# EAGLE board passives (EAGLE 6.3)
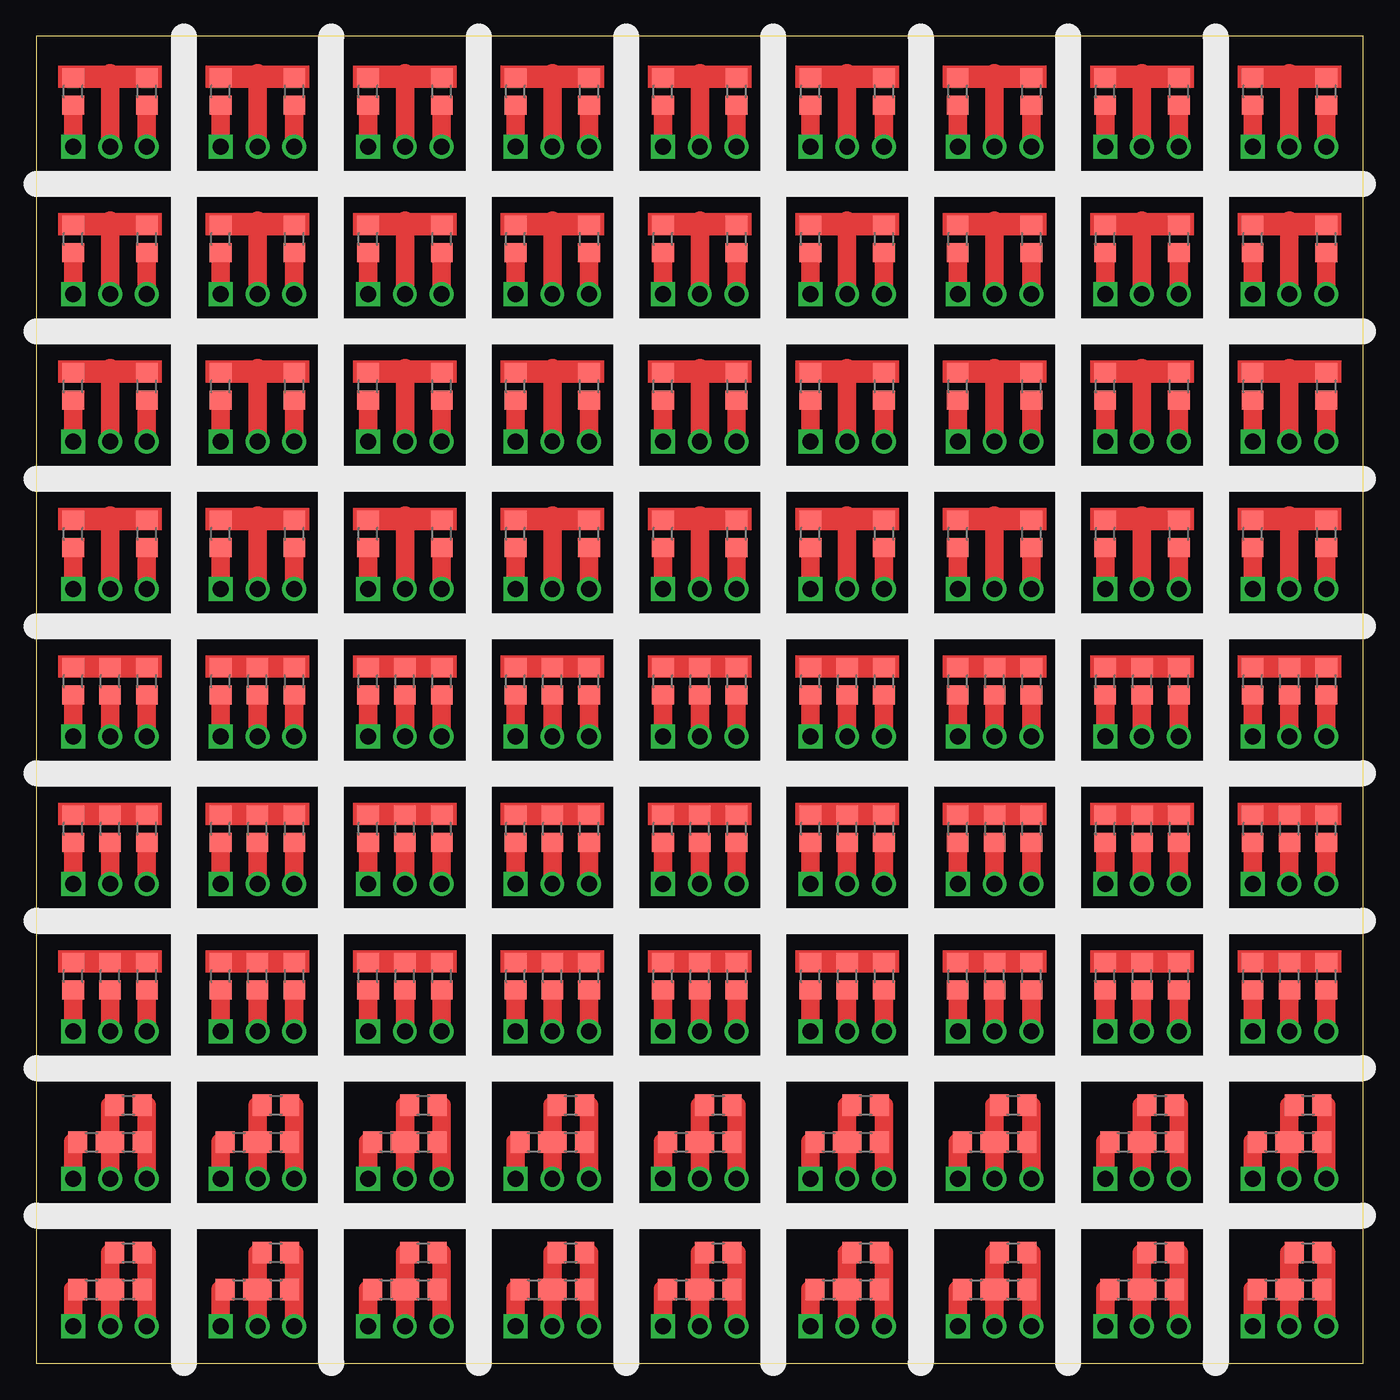
[diagram p0: board, top side]

Size 91.44 x 91.44 mm. Coordinates in mm from the lower left corner, seen from the top.
Outline: 0,0 91.44,0 91.44,91.44 0,91.44 0,0
Copper layers (1*16): Top 0.035mm / dielectric 1.5mm / Bottom 0.035mm
Design rules "default": minimum track width 10mil, minimum drill 24mil, track to track 8mil, track to pad 8mil, pad to pad 8mil, via to via 8mil, smd to smd 8mil, copper to edge 40mil, drill to drill 8mil, minimum pad ring 10mil, minimum via ring 8mil, stop-mask expansion 4mil, vias tented up to drill 0mil, thermal gap 10mil

## Footprints (pad centres in the part's own frame; a part is rotated, then mirrored left to right if it is on the bottom)
R0805 = smd 1.3 x 1.5: 1 -0.95,0; 2 0.95,0

## Placement (x,y rotation side)
E$1  [R0805]  3.81,5.08 0 top
E$2  [R0805]  6.35,5.08 0 top
E$3  [R0805]  13.97,5.08 0 top
E$4  [R0805]  16.51,5.08 0 top
E$5  [R0805]  24.13,5.08 0 top
E$6  [R0805]  26.67,5.08 0 top
E$7  [R0805]  34.29,5.08 0 top
E$8  [R0805]  36.83,5.08 0 top
E$9  [R0805]  44.45,5.08 0 top
E$10  [R0805]  46.99,5.08 0 top
E$11  [R0805]  54.61,5.08 0 top
E$12  [R0805]  57.15,5.08 0 top
E$13  [R0805]  64.77,5.08 0 top
E$14  [R0805]  67.31,5.08 0 top
E$15  [R0805]  74.93,5.08 0 top
E$16  [R0805]  77.47,5.08 0 top
E$17  [R0805]  85.09,5.08 0 top
E$18  [R0805]  87.63,5.08 0 top
E$19  [R0805]  3.81,15.24 0 top
E$20  [R0805]  6.35,15.24 0 top
E$21  [R0805]  13.97,15.24 0 top
E$22  [R0805]  16.51,15.24 0 top
E$23  [R0805]  24.13,15.24 0 top
E$24  [R0805]  26.67,15.24 0 top
E$25  [R0805]  34.29,15.24 0 top
E$26  [R0805]  36.83,15.24 0 top
E$27  [R0805]  44.45,15.24 0 top
E$28  [R0805]  46.99,15.24 0 top
E$29  [R0805]  54.61,15.24 0 top
E$30  [R0805]  57.15,15.24 0 top
E$31  [R0805]  64.77,15.24 0 top
E$32  [R0805]  67.31,15.24 0 top
E$33  [R0805]  74.93,15.24 0 top
E$34  [R0805]  77.47,15.24 0 top
E$35  [R0805]  85.09,15.24 0 top
E$36  [R0805]  87.63,15.24 0 top
E$37  [R0805]  6.35,7.62 0 top
E$38  [R0805]  16.51,7.62 0 top
E$39  [R0805]  26.67,7.62 0 top
E$40  [R0805]  36.83,7.62 0 top
E$41  [R0805]  46.99,7.62 0 top
E$42  [R0805]  57.15,7.62 0 top
E$43  [R0805]  67.31,7.62 0 top
E$44  [R0805]  77.47,7.62 0 top
E$45  [R0805]  87.63,7.62 0 top
E$46  [R0805]  6.35,17.78 0 top
E$47  [R0805]  16.51,17.78 0 top
E$48  [R0805]  26.67,17.78 0 top
E$49  [R0805]  36.83,17.78 0 top
E$50  [R0805]  46.99,17.78 0 top
E$51  [R0805]  57.15,17.78 0 top
E$52  [R0805]  67.31,17.78 0 top
E$53  [R0805]  77.47,17.78 0 top
E$54  [R0805]  87.63,17.78 0 top
E$55  [R0805]  2.54,26.67 90 top
E$56  [R0805]  5.08,26.67 90 top
E$57  [R0805]  7.62,26.67 90 top
E$58  [R0805]  12.7,26.67 90 top
E$59  [R0805]  15.24,26.67 90 top
E$60  [R0805]  17.78,26.67 90 top
E$61  [R0805]  22.86,26.67 90 top
E$62  [R0805]  25.4,26.67 90 top
E$63  [R0805]  27.94,26.67 90 top
E$64  [R0805]  33.02,26.67 90 top
E$65  [R0805]  35.56,26.67 90 top
E$66  [R0805]  38.1,26.67 90 top
E$67  [R0805]  43.18,26.67 90 top
E$68  [R0805]  45.72,26.67 90 top
E$69  [R0805]  48.26,26.67 90 top
E$70  [R0805]  53.34,26.67 90 top
E$71  [R0805]  55.88,26.67 90 top
E$72  [R0805]  58.42,26.67 90 top
E$73  [R0805]  63.5,26.67 90 top
E$74  [R0805]  66.04,26.67 90 top
E$75  [R0805]  68.58,26.67 90 top
E$76  [R0805]  73.66,26.67 90 top
E$77  [R0805]  76.2,26.67 90 top
E$78  [R0805]  78.74,26.67 90 top
E$79  [R0805]  83.82,26.67 90 top
E$80  [R0805]  86.36,26.67 90 top
E$81  [R0805]  88.9,26.67 90 top
E$82  [R0805]  2.54,36.83 90 top
E$83  [R0805]  5.08,36.83 90 top
E$84  [R0805]  7.62,36.83 90 top
E$85  [R0805]  12.7,36.83 90 top
E$86  [R0805]  15.24,36.83 90 top
E$87  [R0805]  17.78,36.83 90 top
E$88  [R0805]  22.86,36.83 90 top
E$89  [R0805]  25.4,36.83 90 top
E$90  [R0805]  27.94,36.83 90 top
E$91  [R0805]  33.02,36.83 90 top
E$92  [R0805]  35.56,36.83 90 top
E$93  [R0805]  38.1,36.83 90 top
E$94  [R0805]  43.18,36.83 90 top
E$95  [R0805]  45.72,36.83 90 top
E$96  [R0805]  48.26,36.83 90 top
E$97  [R0805]  53.34,36.83 90 top
E$98  [R0805]  55.88,36.83 90 top
E$99  [R0805]  58.42,36.83 90 top
E$100  [R0805]  63.5,36.83 90 top
E$101  [R0805]  66.04,36.83 90 top
E$102  [R0805]  68.58,36.83 90 top
E$103  [R0805]  73.66,36.83 90 top
E$104  [R0805]  76.2,36.83 90 top
E$105  [R0805]  78.74,36.83 90 top
E$106  [R0805]  83.82,36.83 90 top
E$107  [R0805]  86.36,36.83 90 top
E$108  [R0805]  88.9,36.83 90 top
E$109  [R0805]  2.54,46.99 90 top
E$110  [R0805]  5.08,46.99 90 top
E$111  [R0805]  7.62,46.99 90 top
E$112  [R0805]  12.7,46.99 90 top
E$113  [R0805]  15.24,46.99 90 top
E$114  [R0805]  17.78,46.99 90 top
E$115  [R0805]  22.86,46.99 90 top
E$116  [R0805]  25.4,46.99 90 top
E$117  [R0805]  27.94,46.99 90 top
E$118  [R0805]  33.02,46.99 90 top
E$119  [R0805]  35.56,46.99 90 top
E$120  [R0805]  38.1,46.99 90 top
E$121  [R0805]  43.18,46.99 90 top
E$122  [R0805]  45.72,46.99 90 top
E$123  [R0805]  48.26,46.99 90 top
E$124  [R0805]  53.34,46.99 90 top
E$125  [R0805]  55.88,46.99 90 top
E$126  [R0805]  58.42,46.99 90 top
E$127  [R0805]  63.5,46.99 90 top
E$128  [R0805]  66.04,46.99 90 top
E$129  [R0805]  68.58,46.99 90 top
E$130  [R0805]  73.66,46.99 90 top
E$131  [R0805]  76.2,46.99 90 top
E$132  [R0805]  78.74,46.99 90 top
E$133  [R0805]  83.82,46.99 90 top
E$134  [R0805]  86.36,46.99 90 top
E$135  [R0805]  88.9,46.99 90 top
E$136  [R0805]  2.54,57.15 90 top
E$137  [R0805]  2.54,67.31 90 top
E$138  [R0805]  7.62,57.15 90 top
E$139  [R0805]  12.7,57.15 90 top
E$140  [R0805]  7.62,67.31 90 top
E$141  [R0805]  17.78,57.15 90 top
E$142  [R0805]  22.86,57.15 90 top
E$143  [R0805]  12.7,67.31 90 top
E$144  [R0805]  27.94,57.15 90 top
E$145  [R0805]  33.02,57.15 90 top
E$146  [R0805]  17.78,67.31 90 top
E$147  [R0805]  38.1,57.15 90 top
E$148  [R0805]  43.18,57.15 90 top
E$149  [R0805]  22.86,67.31 90 top
E$150  [R0805]  48.26,57.15 90 top
E$151  [R0805]  53.34,57.15 90 top
E$152  [R0805]  27.94,67.31 90 top
E$153  [R0805]  58.42,57.15 90 top
E$154  [R0805]  63.5,57.15 90 top
E$155  [R0805]  33.02,67.31 90 top
E$156  [R0805]  68.58,57.15 90 top
E$157  [R0805]  73.66,57.15 90 top
E$158  [R0805]  38.1,67.31 90 top
E$159  [R0805]  78.74,57.15 90 top
E$160  [R0805]  83.82,57.15 90 top
E$161  [R0805]  43.18,67.31 90 top
E$162  [R0805]  88.9,57.15 90 top
E$163  [R0805]  48.26,67.31 90 top
E$164  [R0805]  53.34,67.31 90 top
E$165  [R0805]  58.42,67.31 90 top
E$166  [R0805]  63.5,67.31 90 top
E$167  [R0805]  68.58,67.31 90 top
E$168  [R0805]  73.66,67.31 90 top
E$169  [R0805]  78.74,67.31 90 top
E$170  [R0805]  83.82,67.31 90 top
E$171  [R0805]  88.9,67.31 90 top
E$172  [R0805]  2.54,77.47 90 top
E$173  [R0805]  7.62,77.47 90 top
E$174  [R0805]  12.7,77.47 90 top
E$175  [R0805]  17.78,77.47 90 top
E$176  [R0805]  22.86,77.47 90 top
E$177  [R0805]  27.94,77.47 90 top
E$178  [R0805]  33.02,77.47 90 top
E$179  [R0805]  38.1,77.47 90 top
E$180  [R0805]  43.18,77.47 90 top
E$181  [R0805]  48.26,77.47 90 top
E$182  [R0805]  53.34,77.47 90 top
E$183  [R0805]  58.42,77.47 90 top
E$184  [R0805]  63.5,77.47 90 top
E$185  [R0805]  68.58,77.47 90 top
E$186  [R0805]  73.66,77.47 90 top
E$187  [R0805]  78.74,77.47 90 top
E$188  [R0805]  83.82,77.47 90 top
E$189  [R0805]  88.9,77.47 90 top
E$190  [R0805]  2.54,87.63 90 top
E$191  [R0805]  7.62,87.63 90 top
E$192  [R0805]  12.7,87.63 90 top
E$193  [R0805]  17.78,87.63 90 top
E$194  [R0805]  22.86,87.63 90 top
E$195  [R0805]  27.94,87.63 90 top
E$196  [R0805]  33.02,87.63 90 top
E$197  [R0805]  38.1,87.63 90 top
E$198  [R0805]  43.18,87.63 90 top
E$199  [R0805]  48.26,87.63 90 top
E$200  [R0805]  53.34,87.63 90 top
E$201  [R0805]  58.42,87.63 90 top
E$202  [R0805]  63.5,87.63 90 top
E$203  [R0805]  68.58,87.63 90 top
E$204  [R0805]  73.66,87.63 90 top
E$205  [R0805]  78.74,87.63 90 top
E$206  [R0805]  83.82,87.63 90 top
E$207  [R0805]  88.9,87.63 90 top

## Library data of the parts
E$1-E$207 = nolan-utsa

## Tracks (layer width: path | path; a pad name or v marks a point on that pad's centre or on a via)
S$1  (via drill 1.1)
  Top 1.27: v2.54,2.54 2.54,5.08
S$2  (via drill 1.1)
  Top 1.27: v12.7,2.54 12.7,5.08
S$3  (via drill 1.1)
  Top 1.27: v5.08,2.54 5.08,7.62
S$4  (via drill 1.1)
  Top 1.27: v7.62,2.54 7.62,7.62
S$5  (via drill 1.1)
  Top 1.27: 15.24,7.62 v15.24,2.54
S$6  (via drill 1.1)
  Top 1.27: v17.78,2.54 17.78,7.62
S$7  (via drill 1.1)
  Top 1.27: v22.86,2.54 22.86,5.08
S$8  (via drill 1.1)
  Top 1.27: v25.4,2.54 25.4,7.62
S$9  (via drill 1.1)
  Top 1.27: v27.94,2.54 27.94,7.62
S$10  (via drill 1.1)
  Top 1.27: v33.02,2.54 33.02,5.08
S$11  (via drill 1.1)
  Top 1.27: v35.56,2.54 35.56,7.62
S$12  (via drill 1.1)
  Top 1.27: v38.1,2.54 38.1,7.62
S$13  (via drill 1.1)
  Top 1.27: v43.18,2.54 43.18,5.08
S$14  (via drill 1.1)
  Top 1.27: v45.72,2.54 45.72,7.62
S$15  (via drill 1.1)
  Top 1.27: v48.26,2.54 48.26,7.62
S$16  (via drill 1.1)
  Top 1.27: v53.34,2.54 53.34,5.08
S$17  (via drill 1.1)
  Top 1.27: v55.88,2.54 55.88,7.62
S$18  (via drill 1.1)
  Top 1.27: v58.42,2.54 58.42,7.62
S$19  (via drill 1.1)
  Top 1.27: v63.5,2.54 63.5,5.08
S$20  (via drill 1.1)
  Top 1.27: v66.04,2.54 66.04,7.62
S$21  (via drill 1.1)
  Top 1.27: v68.58,2.54 68.58,7.62
S$22  (via drill 1.1)
  Top 1.27: v73.66,2.54 73.66,5.08
S$23  (via drill 1.1)
  Top 1.27: v76.2,2.54 76.2,7.62
S$24  (via drill 1.1)
  Top 1.27: v78.74,2.54 78.74,7.62
S$25  (via drill 1.1)
  Top 1.27: v83.82,2.54 83.82,5.08
S$26  (via drill 1.1)
  Top 1.27: v86.36,2.54 86.36,7.62
S$27  (via drill 1.1)
  Top 1.27: v88.9,2.54 88.9,7.62
S$28  (via drill 1.1)
  Top 1.27: v2.54,12.7 2.54,15.24
S$29  (via drill 1.1)
  Top 1.27: v5.08,12.7 5.08,15.24
S$30  (via drill 1.1)
  Top 1.27: v7.62,12.7 7.62,15.24
S$31  (via drill 1.1)
  Top 1.27: v12.7,12.7 12.7,15.24
S$32  (via drill 1.1)
  Top 1.27: v15.24,12.7 15.24,15.24
S$33  (via drill 1.1)
  Top 1.27: v17.78,12.7 17.78,15.24
S$34  (via drill 1.1)
  Top 1.27: v22.86,12.7 22.86,15.24
S$35  (via drill 1.1)
  Top 1.27: v25.4,12.7 25.4,15.24
S$36  (via drill 1.1)
  Top 1.27: v27.94,12.7 27.94,15.24
S$37  (via drill 1.1)
  Top 1.27: v33.02,12.7 33.02,15.24
S$38  (via drill 1.1)
  Top 1.27: v35.56,12.7 35.56,15.24
S$39  (via drill 1.1)
  Top 1.27: v38.1,12.7 38.1,15.24
S$40  (via drill 1.1)
  Top 1.27: v43.18,12.7 43.18,15.24
S$41  (via drill 1.1)
  Top 1.27: v45.72,12.7 45.72,15.24
S$42  (via drill 1.1)
  Top 1.27: v48.26,12.7 48.26,15.24
S$43  (via drill 1.1)
  Top 1.27: v53.34,12.7 53.34,15.24
S$44  (via drill 1.1)
  Top 1.27: v55.88,12.7 55.88,15.24
S$45  (via drill 1.1)
  Top 1.27: v58.42,12.7 58.42,15.24
S$46  (via drill 1.1)
  Top 1.27: v63.5,12.7 63.5,15.24
S$47  (via drill 1.1)
  Top 1.27: v66.04,12.7 66.04,15.24
S$48  (via drill 1.1)
  Top 1.27: v68.58,12.7 68.58,15.24
S$49  (via drill 1.1)
  Top 1.27: v73.66,12.7 73.66,15.24
S$50  (via drill 1.1)
  Top 1.27: v76.2,12.7 76.2,15.24
S$51  (via drill 1.1)
  Top 1.27: v78.74,12.7 78.74,15.24
S$52  (via drill 1.1)
  Top 1.27: v83.82,12.7 83.82,15.24
S$53  (via drill 1.1)
  Top 1.27: v86.36,12.7 86.36,15.24
S$54  (via drill 1.1)
  Top 1.27: v88.9,12.7 88.9,15.24
S$55
  Top 1.27: 5.08,15.24 5.08,17.78
S$56
  Top 1.27: 7.62,12.7 7.62,17.78
S$57
  Top 1.27: 15.24,17.78 15.24,15.24
S$58
  Top 1.27: 17.78,12.7 17.78,17.78
S$59
  Top 1.27: 25.4,12.7 25.4,17.78
S$60
  Top 1.27: 27.94,12.7 27.94,17.78
S$65
  Top 1.27: 35.56,12.7 35.56,17.78
S$66
  Top 1.27: 38.1,12.7 38.1,17.78
S$67
  Top 1.27: 45.72,12.7 45.72,17.78
S$68
  Top 1.27: 48.26,12.7 48.26,17.78
S$69
  Top 1.27: 55.88,12.7 55.88,17.78
S$70
  Top 1.27: 58.42,12.7 58.42,17.78
S$71
  Top 1.27: 66.04,12.7 66.04,17.78
S$72
  Top 1.27: 68.58,12.7 68.58,17.78
S$73
  Top 1.27: 76.2,12.7 76.2,17.78
S$74
  Top 1.27: 78.74,12.7 78.74,17.78
S$75
  Top 1.27: 86.36,12.7 86.36,17.78
S$76
  Top 1.27: 88.9,12.7 88.9,17.78
S$77  (via drill 1.1)
  Top 1.27: v2.54,22.86 2.54,25.4
S$78  (via drill 1.1)
  other vias: 12.7,22.86
S$79  (via drill 1.1)
  other vias: 22.86,22.86
S$80  (via drill 1.1)
  Top 1.27: v33.02,22.86 33.02,25.4
S$81  (via drill 1.1)
  other vias: 43.18,22.86
S$82  (via drill 1.1)
  other vias: 53.34,22.86
S$83  (via drill 1.1)
  Top 1.27: v35.56,22.86 35.56,25.4
S$84  (via drill 1.1)
  Top 1.27: v38.1,22.86 38.1,25.4
S$85  (via drill 1.1)
  other vias: 45.72,22.86
S$86  (via drill 1.1)
  Top 1.27: v5.08,22.86 5.08,25.4
S$87  (via drill 1.1)
  Top 1.27: v7.62,22.86 7.62,25.4
S$88  (via drill 1.1)
  other vias: 15.24,22.86
S$89  (via drill 1.1)
  other vias: 17.78,22.86
S$90  (via drill 1.1)
  other vias: 25.4,22.86
S$91  (via drill 1.1)
  other vias: 27.94,22.86
S$92  (via drill 1.1)
  other vias: 48.26,22.86
S$93  (via drill 1.1)
  other vias: 55.88,22.86
S$94  (via drill 1.1)
  other vias: 58.42,22.86
S$95
  Top 1.27: 43.18,22.86 43.18,25.4
S$96
  Top 1.27: 45.72,22.86 45.72,25.4
S$97
  Top 1.27: 48.26,22.86 48.26,25.4
S$98
  Top 1.27: 53.34,22.86 53.34,25.4
S$99
  Top 1.27: 55.88,22.86 55.88,25.4
S$100
  Top 1.27: 58.42,22.86 58.42,25.4
S$101  (via drill 1.1)
  Top 1.27: v63.5,22.86 63.5,25.4
S$102  (via drill 1.1)
  other vias: 73.66,22.86
S$103  (via drill 1.1)
  other vias: 83.82,22.86
S$104
  Top 1.27: 12.7,22.86 12.7,25.4
S$105
  Top 1.27: 15.24,22.86 15.24,25.4
S$106
  Top 1.27: 17.78,22.86 17.78,25.4
S$107
  Top 1.27: 22.86,22.86 22.86,25.4
S$108
  Top 1.27: 25.4,22.86 25.4,25.4
S$109
  Top 1.27: 27.94,22.86 27.94,25.4
S$110  (via drill 1.1)
  Top 1.27: v66.04,22.86 66.04,25.4
S$111  (via drill 1.1)
  Top 1.27: v68.58,22.86 68.58,25.4
S$112  (via drill 1.1)
  other vias: 76.2,22.86
S$113  (via drill 1.1)
  other vias: 78.74,22.86
S$114  (via drill 1.1)
  other vias: 86.36,22.86
S$115  (via drill 1.1)
  other vias: 88.9,22.86
S$116
  Top 1.27: 73.66,22.86 73.66,25.4
S$117
  Top 1.27: 76.2,22.86 76.2,25.4
S$118
  Top 1.27: 78.74,22.86 78.74,25.4
S$119
  Top 1.27: 83.82,22.86 83.82,25.4
S$120
  Top 1.27: 86.36,22.86 86.36,25.4
S$121
  Top 1.27: 88.9,22.86 88.9,25.4
S$122  (via drill 1.1)
  Top 1.27: v2.54,33.02 2.54,35.56
S$123  (via drill 1.1)
  other vias: 12.7,33.02
S$124  (via drill 1.1)
  other vias: 22.86,33.02
S$125  (via drill 1.1)
  Top 1.27: v5.08,33.02 5.08,35.56
S$126  (via drill 1.1)
  Top 1.27: v7.62,33.02 7.62,35.56
S$127  (via drill 1.1)
  other vias: 15.24,33.02
S$128  (via drill 1.1)
  other vias: 17.78,33.02
S$129  (via drill 1.1)
  other vias: 25.4,33.02
S$130  (via drill 1.1)
  other vias: 27.94,33.02
S$131
  Top 1.27: 12.7,33.02 12.7,35.56
S$132
  Top 1.27: 15.24,33.02 15.24,35.56
S$133
  Top 1.27: 17.78,33.02 17.78,35.56
S$134
  Top 1.27: 22.86,33.02 22.86,35.56
S$135
  Top 1.27: 25.4,33.02 25.4,35.56
S$136
  Top 1.27: 27.94,33.02 27.94,35.56
S$137  (via drill 1.1)
  Top 1.27: v33.02,33.02 33.02,35.56
S$138  (via drill 1.1)
  other vias: 43.18,33.02
S$139  (via drill 1.1)
  other vias: 53.34,33.02
S$140  (via drill 1.1)
  Top 1.27: v35.56,33.02 35.56,35.56
S$141  (via drill 1.1)
  Top 1.27: v38.1,33.02 38.1,35.56
S$142  (via drill 1.1)
  other vias: 45.72,33.02
S$143  (via drill 1.1)
  other vias: 48.26,33.02
S$144  (via drill 1.1)
  other vias: 55.88,33.02
S$145  (via drill 1.1)
  other vias: 58.42,33.02
S$146
  Top 1.27: 43.18,33.02 43.18,35.56
S$147
  Top 1.27: 45.72,33.02 45.72,35.56
S$148
  Top 1.27: 48.26,33.02 48.26,35.56
S$149
  Top 1.27: 53.34,33.02 53.34,35.56
S$150
  Top 1.27: 55.88,33.02 55.88,35.56
S$151
  Top 1.27: 58.42,33.02 58.42,35.56
S$152  (via drill 1.1)
  Top 1.27: v63.5,33.02 63.5,35.56
S$153  (via drill 1.1)
  other vias: 73.66,33.02
S$154  (via drill 1.1)
  other vias: 83.82,33.02
S$155  (via drill 1.1)
  Top 1.27: v66.04,33.02 66.04,35.56
S$156  (via drill 1.1)
  Top 1.27: v68.58,33.02 68.58,35.56
S$157  (via drill 1.1)
  other vias: 76.2,33.02
S$158  (via drill 1.1)
  other vias: 78.74,33.02
S$159  (via drill 1.1)
  other vias: 86.36,33.02
S$160  (via drill 1.1)
  other vias: 88.9,33.02
S$161
  Top 1.27: 73.66,33.02 73.66,35.56
S$162
  Top 1.27: 76.2,33.02 76.2,35.56
S$163
  Top 1.27: 78.74,33.02 78.74,35.56
S$164
  Top 1.27: 83.82,33.02 83.82,35.56
S$165
  Top 1.27: 86.36,33.02 86.36,35.56
S$166
  Top 1.27: 88.9,33.02 88.9,35.56
S$167  (via drill 1.1)
  Top 1.27: v2.54,43.18 2.54,45.72
S$168  (via drill 1.1)
  other vias: 12.7,43.18
S$169  (via drill 1.1)
  other vias: 22.86,43.18
S$170  (via drill 1.1)
  Top 1.27: v5.08,43.18 5.08,45.72
S$171  (via drill 1.1)
  Top 1.27: v7.62,43.18 7.62,45.72
S$172  (via drill 1.1)
  other vias: 15.24,43.18
S$173  (via drill 1.1)
  other vias: 17.78,43.18
S$174  (via drill 1.1)
  other vias: 25.4,43.18
S$175  (via drill 1.1)
  other vias: 27.94,43.18
S$176
  Top 1.27: 12.7,43.18 12.7,45.72
S$177
  Top 1.27: 15.24,43.18 15.24,45.72
S$178
  Top 1.27: 17.78,43.18 17.78,45.72
S$179
  Top 1.27: 22.86,43.18 22.86,45.72
S$180
  Top 1.27: 25.4,43.18 25.4,45.72
S$181
  Top 1.27: 27.94,43.18 27.94,45.72
S$182  (via drill 1.1)
  Top 1.27: v33.02,43.18 33.02,45.72
S$183  (via drill 1.1)
  other vias: 43.18,43.18
S$184  (via drill 1.1)
  other vias: 53.34,43.18
S$185  (via drill 1.1)
  Top 1.27: v35.56,43.18 35.56,45.72
S$186  (via drill 1.1)
  Top 1.27: v38.1,43.18 38.1,45.72
S$187  (via drill 1.1)
  other vias: 45.72,43.18
S$188  (via drill 1.1)
  other vias: 48.26,43.18
S$189  (via drill 1.1)
  other vias: 55.88,43.18
S$190  (via drill 1.1)
  other vias: 58.42,43.18
S$191
  Top 1.27: 43.18,43.18 43.18,45.72
S$192
  Top 1.27: 45.72,43.18 45.72,45.72
S$193
  Top 1.27: 48.26,43.18 48.26,45.72
S$194
  Top 1.27: 53.34,43.18 53.34,45.72
S$195
  Top 1.27: 55.88,43.18 55.88,45.72
S$196
  Top 1.27: 58.42,43.18 58.42,45.72
S$197  (via drill 1.1)
  Top 1.27: v63.5,43.18 63.5,45.72
S$198  (via drill 1.1)
  other vias: 73.66,43.18
S$199  (via drill 1.1)
  other vias: 83.82,43.18
S$200  (via drill 1.1)
  Top 1.27: v66.04,43.18 66.04,45.72
S$201  (via drill 1.1)
  Top 1.27: v68.58,43.18 68.58,45.72
S$202  (via drill 1.1)
  other vias: 76.2,43.18
S$203  (via drill 1.1)
  other vias: 78.74,43.18
S$204  (via drill 1.1)
  other vias: 86.36,43.18
S$205  (via drill 1.1)
  other vias: 88.9,43.18
S$206
  Top 1.27: 73.66,43.18 73.66,45.72
S$207
  Top 1.27: 76.2,43.18 76.2,45.72
S$208
  Top 1.27: 78.74,43.18 78.74,45.72
S$209
  Top 1.27: 83.82,43.18 83.82,45.72
S$210
  Top 1.27: 86.36,43.18 86.36,45.72
S$211
  Top 1.27: 88.9,43.18 88.9,45.72
S$212  (via drill 1.1)
  Top 1.27: v2.54,53.34 2.54,55.88
S$213  (via drill 1.1)
  other vias: 12.7,53.34
S$214  (via drill 1.1)
  other vias: 22.86,53.34
S$215  (via drill 1.1)
  Top 1.27: v5.08,53.34 5.08,58.42
S$216  (via drill 1.1)
  Top 1.27: v7.62,53.34 7.62,55.88
S$217  (via drill 1.1)
  other vias: 15.24,53.34
S$218  (via drill 1.1)
  other vias: 17.78,53.34
S$219  (via drill 1.1)
  other vias: 25.4,53.34
S$220  (via drill 1.1)
  other vias: 27.94,53.34
S$221
  Top 1.27: 12.7,53.34 12.7,55.88
S$222
  Top 1.27: 15.24,53.34 15.24,58.42
S$223
  Top 1.27: 17.78,53.34 17.78,55.88
S$224
  Top 1.27: 22.86,53.34 22.86,55.88
S$225
  Top 1.27: 25.4,53.34 25.4,58.42
S$226
  Top 1.27: 27.94,53.34 27.94,55.88
S$227  (via drill 1.1)
  Top 1.27: v33.02,53.34 33.02,55.88
S$228  (via drill 1.1)
  other vias: 43.18,53.34
S$229  (via drill 1.1)
  other vias: 53.34,53.34
S$230  (via drill 1.1)
  Top 1.27: v35.56,53.34 35.56,58.42
S$231  (via drill 1.1)
  Top 1.27: v38.1,53.34 38.1,55.88
S$232  (via drill 1.1)
  other vias: 45.72,53.34
S$233  (via drill 1.1)
  other vias: 48.26,53.34
S$234  (via drill 1.1)
  other vias: 55.88,53.34
S$235  (via drill 1.1)
  other vias: 58.42,53.34
S$236
  Top 1.27: 43.18,53.34 43.18,55.88
S$237
  Top 1.27: 45.72,53.34 45.72,58.42
S$238
  Top 1.27: 48.26,53.34 48.26,55.88
S$239
  Top 1.27: 53.34,53.34 53.34,55.88
S$240
  Top 1.27: 55.88,53.34 55.88,58.42
S$241
  Top 1.27: 58.42,53.34 58.42,55.88
S$242  (via drill 1.1)
  Top 1.27: v63.5,53.34 63.5,55.88
S$243  (via drill 1.1)
  other vias: 73.66,53.34
S$244  (via drill 1.1)
  other vias: 83.82,53.34
S$245  (via drill 1.1)
  Top 1.27: v66.04,53.34 66.04,58.42
S$246  (via drill 1.1)
  Top 1.27: v68.58,53.34 68.58,55.88
S$247  (via drill 1.1)
  other vias: 76.2,53.34
S$248  (via drill 1.1)
  other vias: 78.74,53.34
S$249  (via drill 1.1)
  other vias: 86.36,53.34
S$250  (via drill 1.1)
  other vias: 88.9,53.34
S$251
  Top 1.27: 73.66,53.34 73.66,55.88
S$252
  Top 1.27: 76.2,53.34 76.2,58.42
S$253
  Top 1.27: 78.74,53.34 78.74,55.88
S$254
  Top 1.27: 83.82,53.34 83.82,55.88
S$255
  Top 1.27: 86.36,53.34 86.36,58.42
S$256
  Top 1.27: 88.9,53.34 88.9,55.88
S$257  (via drill 1.1)
  Top 1.27: v2.54,63.5 2.54,66.04
S$258  (via drill 1.1)
  other vias: 12.7,63.5
S$259  (via drill 1.1)
  other vias: 22.86,63.5
S$260  (via drill 1.1)
  Top 1.27: v5.08,63.5 5.08,68.58
S$261  (via drill 1.1)
  Top 1.27: v7.62,63.5 7.62,66.04
S$262  (via drill 1.1)
  other vias: 15.24,63.5
S$263  (via drill 1.1)
  other vias: 17.78,63.5
S$264  (via drill 1.1)
  other vias: 25.4,63.5
S$265  (via drill 1.1)
  other vias: 27.94,63.5
S$266
  Top 1.27: 12.7,63.5 12.7,66.04
S$267
  Top 1.27: 15.24,63.5 15.24,68.58
S$268
  Top 1.27: 17.78,63.5 17.78,66.04
S$269
  Top 1.27: 22.86,63.5 22.86,66.04
S$270
  Top 1.27: 25.4,63.5 25.4,68.58
S$271
  Top 1.27: 27.94,63.5 27.94,66.04
S$272  (via drill 1.1)
  Top 1.27: v33.02,63.5 33.02,66.04
S$273  (via drill 1.1)
  other vias: 43.18,63.5
S$274  (via drill 1.1)
  other vias: 53.34,63.5
S$275  (via drill 1.1)
  Top 1.27: v35.56,63.5 35.56,68.58
S$276  (via drill 1.1)
  Top 1.27: v38.1,63.5 38.1,66.04
S$277  (via drill 1.1)
  other vias: 45.72,63.5
S$278  (via drill 1.1)
  other vias: 48.26,63.5
S$279  (via drill 1.1)
  other vias: 55.88,63.5
S$280  (via drill 1.1)
  other vias: 58.42,63.5
S$281
  Top 1.27: 43.18,63.5 43.18,66.04
S$282
  Top 1.27: 45.72,63.5 45.72,68.58
S$283
  Top 1.27: 48.26,63.5 48.26,66.04
S$284
  Top 1.27: 53.34,63.5 53.34,66.04
S$285
  Top 1.27: 55.88,63.5 55.88,68.58
S$286
  Top 1.27: 58.42,63.5 58.42,66.04
S$287  (via drill 1.1)
  Top 1.27: v63.5,63.5 63.5,66.04
S$288  (via drill 1.1)
  other vias: 73.66,63.5
S$289  (via drill 1.1)
  other vias: 83.82,63.5
S$290  (via drill 1.1)
  Top 1.27: v66.04,63.5 66.04,68.58
S$291  (via drill 1.1)
  Top 1.27: v68.58,63.5 68.58,66.04
S$292  (via drill 1.1)
  other vias: 76.2,63.5
S$293  (via drill 1.1)
  other vias: 78.74,63.5
S$294  (via drill 1.1)
  other vias: 86.36,63.5
S$295  (via drill 1.1)
  other vias: 88.9,63.5
S$296
  Top 1.27: 73.66,63.5 73.66,66.04
S$297
  Top 1.27: 76.2,63.5 76.2,68.58
S$298
  Top 1.27: 78.74,63.5 78.74,66.04
S$299
  Top 1.27: 83.82,63.5 83.82,66.04
S$300
  Top 1.27: 86.36,63.5 86.36,68.58
S$301
  Top 1.27: 88.9,63.5 88.9,66.04
S$302  (via drill 1.1)
  Top 1.27: v2.54,73.66 2.54,76.2
S$303  (via drill 1.1)
  other vias: 12.7,73.66
S$304  (via drill 1.1)
  other vias: 22.86,73.66
S$305  (via drill 1.1)
  Top 1.27: v5.08,73.66 5.08,78.74
S$306  (via drill 1.1)
  Top 1.27: v7.62,73.66 7.62,76.2
S$307  (via drill 1.1)
  other vias: 15.24,73.66
S$308  (via drill 1.1)
  other vias: 17.78,73.66
S$309  (via drill 1.1)
  other vias: 25.4,73.66
S$310  (via drill 1.1)
  other vias: 27.94,73.66
S$311
  Top 1.27: 12.7,73.66 12.7,76.2
S$312
  Top 1.27: 15.24,73.66 15.24,78.74
S$313
  Top 1.27: 17.78,73.66 17.78,76.2
S$314
  Top 1.27: 22.86,73.66 22.86,76.2
S$315
  Top 1.27: 25.4,73.66 25.4,78.74
S$316
  Top 1.27: 27.94,73.66 27.94,76.2
S$317  (via drill 1.1)
  Top 1.27: v33.02,73.66 33.02,76.2
S$318  (via drill 1.1)
  other vias: 43.18,73.66
S$319  (via drill 1.1)
  other vias: 53.34,73.66
S$320  (via drill 1.1)
  Top 1.27: v35.56,73.66 35.56,78.74
S$321  (via drill 1.1)
  Top 1.27: v38.1,73.66 38.1,76.2
S$322  (via drill 1.1)
  other vias: 45.72,73.66
S$323  (via drill 1.1)
  other vias: 48.26,73.66
S$324  (via drill 1.1)
  other vias: 55.88,73.66
S$325  (via drill 1.1)
  other vias: 58.42,73.66
S$326
  Top 1.27: 43.18,73.66 43.18,76.2
S$327
  Top 1.27: 45.72,73.66 45.72,78.74
S$328
  Top 1.27: 48.26,73.66 48.26,76.2
S$329
  Top 1.27: 53.34,73.66 53.34,76.2
S$330
  Top 1.27: 55.88,73.66 55.88,78.74
S$331
  Top 1.27: 58.42,73.66 58.42,76.2
S$332  (via drill 1.1)
  Top 1.27: v63.5,73.66 63.5,76.2
S$333  (via drill 1.1)
  other vias: 73.66,73.66
S$334  (via drill 1.1)
  other vias: 83.82,73.66
S$335  (via drill 1.1)
  Top 1.27: v66.04,73.66 66.04,78.74
S$336  (via drill 1.1)
  Top 1.27: v68.58,73.66 68.58,76.2
S$337  (via drill 1.1)
  other vias: 76.2,73.66
S$338  (via drill 1.1)
  other vias: 78.74,73.66
S$339  (via drill 1.1)
  other vias: 86.36,73.66
S$340  (via drill 1.1)
  other vias: 88.9,73.66
S$341
  Top 1.27: 73.66,73.66 73.66,76.2
S$342
  Top 1.27: 76.2,73.66 76.2,78.74
S$343
  Top 1.27: 78.74,73.66 78.74,76.2
S$344
  Top 1.27: 83.82,73.66 83.82,76.2
S$345
  Top 1.27: 86.36,73.66 86.36,78.74
S$346
  Top 1.27: 88.9,73.66 88.9,76.2
S$347  (via drill 1.1)
  Top 1.27: v2.54,83.82 2.54,86.36
S$348  (via drill 1.1)
  other vias: 12.7,83.82
S$349  (via drill 1.1)
  other vias: 22.86,83.82
S$350  (via drill 1.1)
  Top 1.27: v5.08,83.82 5.08,88.9
S$351  (via drill 1.1)
  Top 1.27: v7.62,83.82 7.62,86.36
S$352  (via drill 1.1)
  other vias: 15.24,83.82
S$353  (via drill 1.1)
  other vias: 17.78,83.82
S$354  (via drill 1.1)
  other vias: 25.4,83.82
S$355  (via drill 1.1)
  other vias: 27.94,83.82
S$356
  Top 1.27: 12.7,83.82 12.7,86.36
S$357
  Top 1.27: 15.24,83.82 15.24,88.9
S$358
  Top 1.27: 17.78,83.82 17.78,86.36
S$359
  Top 1.27: 22.86,83.82 22.86,86.36
S$360
  Top 1.27: 25.4,83.82 25.4,88.9
S$361
  Top 1.27: 27.94,83.82 27.94,86.36
S$362  (via drill 1.1)
  Top 1.27: v33.02,83.82 33.02,86.36
S$363  (via drill 1.1)
  other vias: 43.18,83.82
S$364  (via drill 1.1)
  other vias: 53.34,83.82
S$365  (via drill 1.1)
  Top 1.27: v35.56,83.82 35.56,88.9
S$366  (via drill 1.1)
  Top 1.27: v38.1,83.82 38.1,86.36
S$367  (via drill 1.1)
  other vias: 45.72,83.82
S$368  (via drill 1.1)
  other vias: 48.26,83.82
S$369  (via drill 1.1)
  other vias: 55.88,83.82
S$370  (via drill 1.1)
  other vias: 58.42,83.82
S$371
  Top 1.27: 43.18,83.82 43.18,86.36
S$372
  Top 1.27: 45.72,83.82 45.72,88.9
S$373
  Top 1.27: 48.26,83.82 48.26,86.36
S$374
  Top 1.27: 53.34,83.82 53.34,86.36
S$375
  Top 1.27: 55.88,83.82 55.88,88.9
S$376
  Top 1.27: 58.42,83.82 58.42,86.36
S$377  (via drill 1.1)
  Top 1.27: v63.5,83.82 63.5,86.36
S$378  (via drill 1.1)
  other vias: 73.66,83.82
S$379  (via drill 1.1)
  other vias: 83.82,83.82
S$380  (via drill 1.1)
  Top 1.27: v66.04,83.82 66.04,88.9
S$381  (via drill 1.1)
  Top 1.27: v68.58,83.82 68.58,86.36
S$382  (via drill 1.1)
  other vias: 76.2,83.82
S$383  (via drill 1.1)
  other vias: 78.74,83.82
S$384  (via drill 1.1)
  other vias: 86.36,83.82
S$385  (via drill 1.1)
  other vias: 88.9,83.82
S$386
  Top 1.27: 73.66,83.82 73.66,86.36
S$387
  Top 1.27: 76.2,83.82 76.2,88.9
S$388
  Top 1.27: 78.74,83.82 78.74,86.36
S$389
  Top 1.27: 83.82,83.82 83.82,86.36
S$390
  Top 1.27: 86.36,83.82 86.36,88.9
S$391
  Top 1.27: 88.9,83.82 88.9,86.36
(copper drawn outside any net)
  shapes: Top area x63